# Altium PCB TundraHaptics.PcbDoc
Units mil, origin at the board's own origin, x right, y up, seen from the top; angles counter-clockwise.
Board outline 1690.47 x 1037.77 mil, 2 copper layers (Top Layer, Bottom Layer); 9 components, 5 nets, 42 pads, 0 vias.
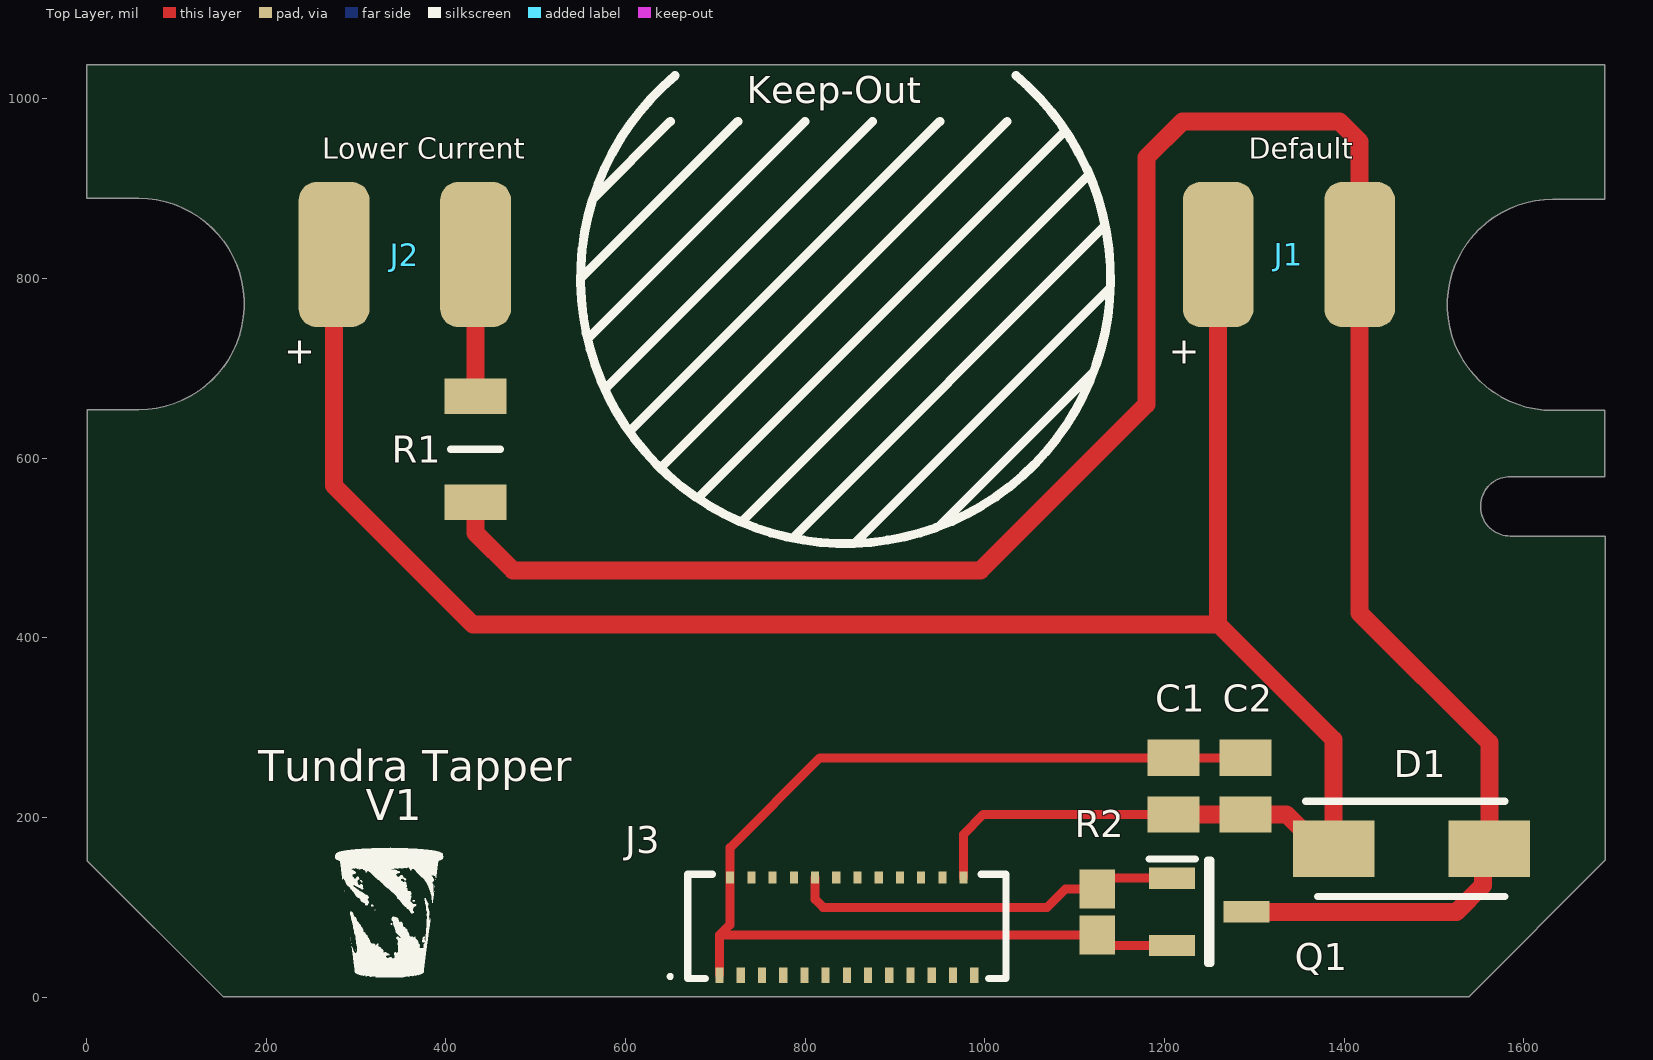
[diagram p0: Top Layer view]
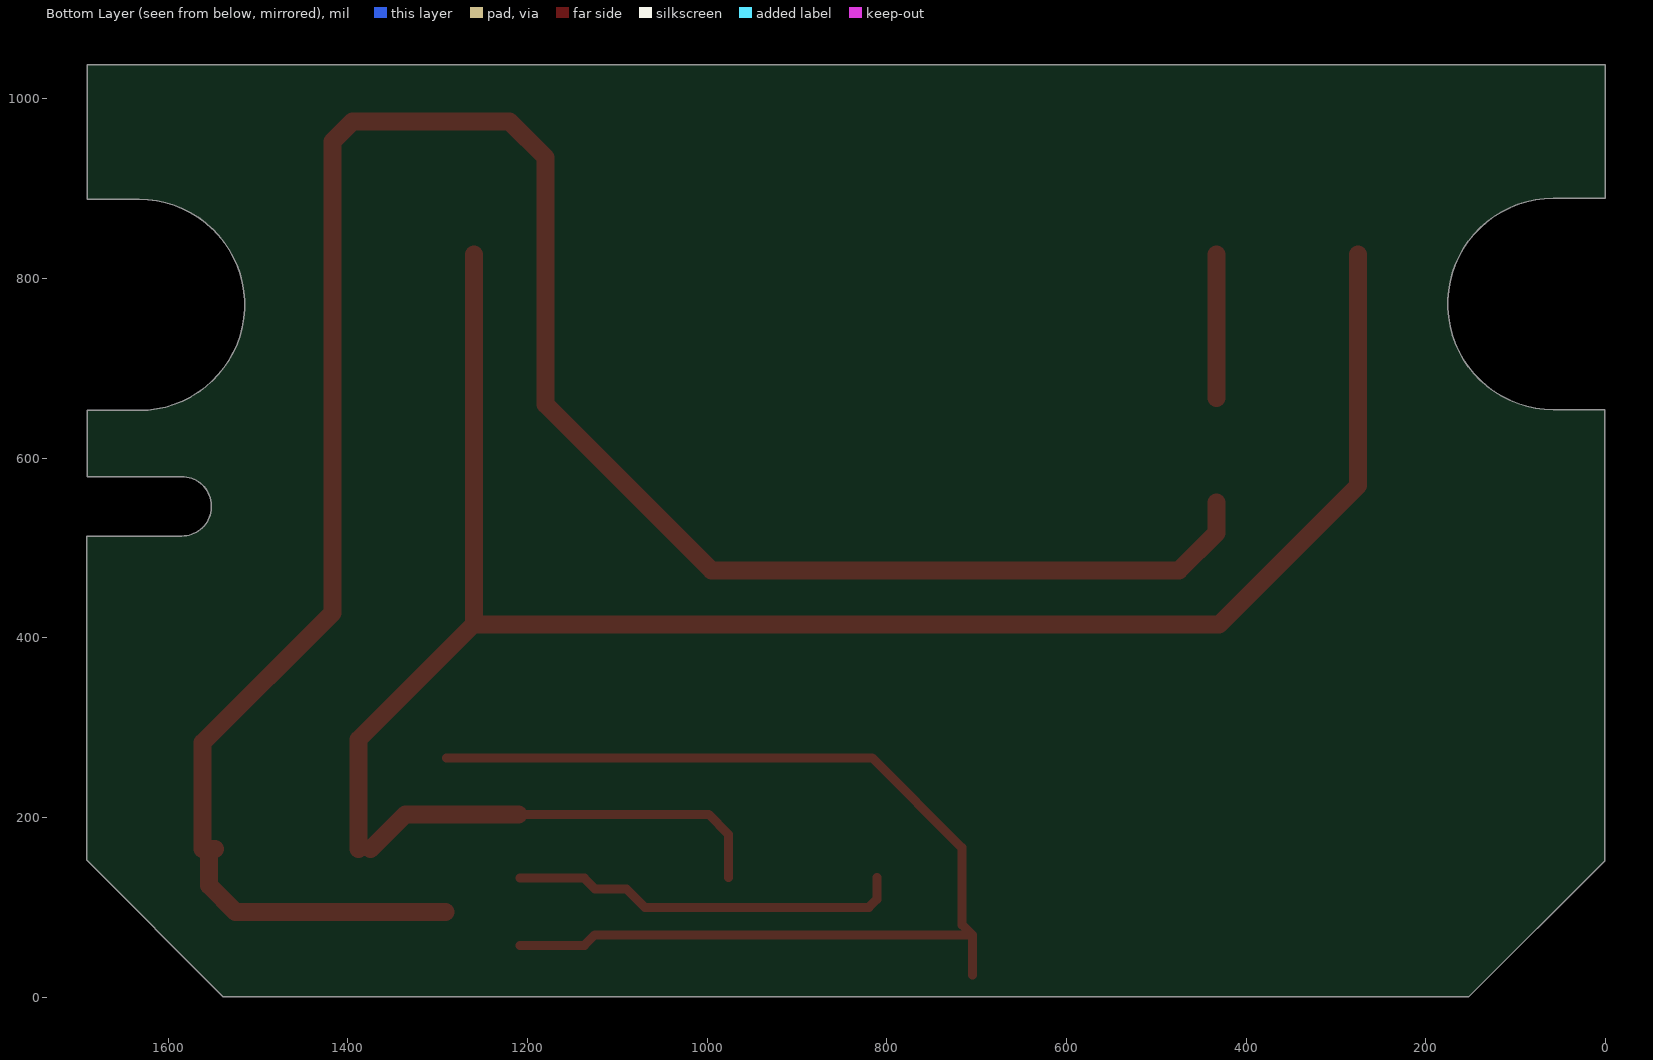
[diagram p1: Bottom Layer view, seen from below]
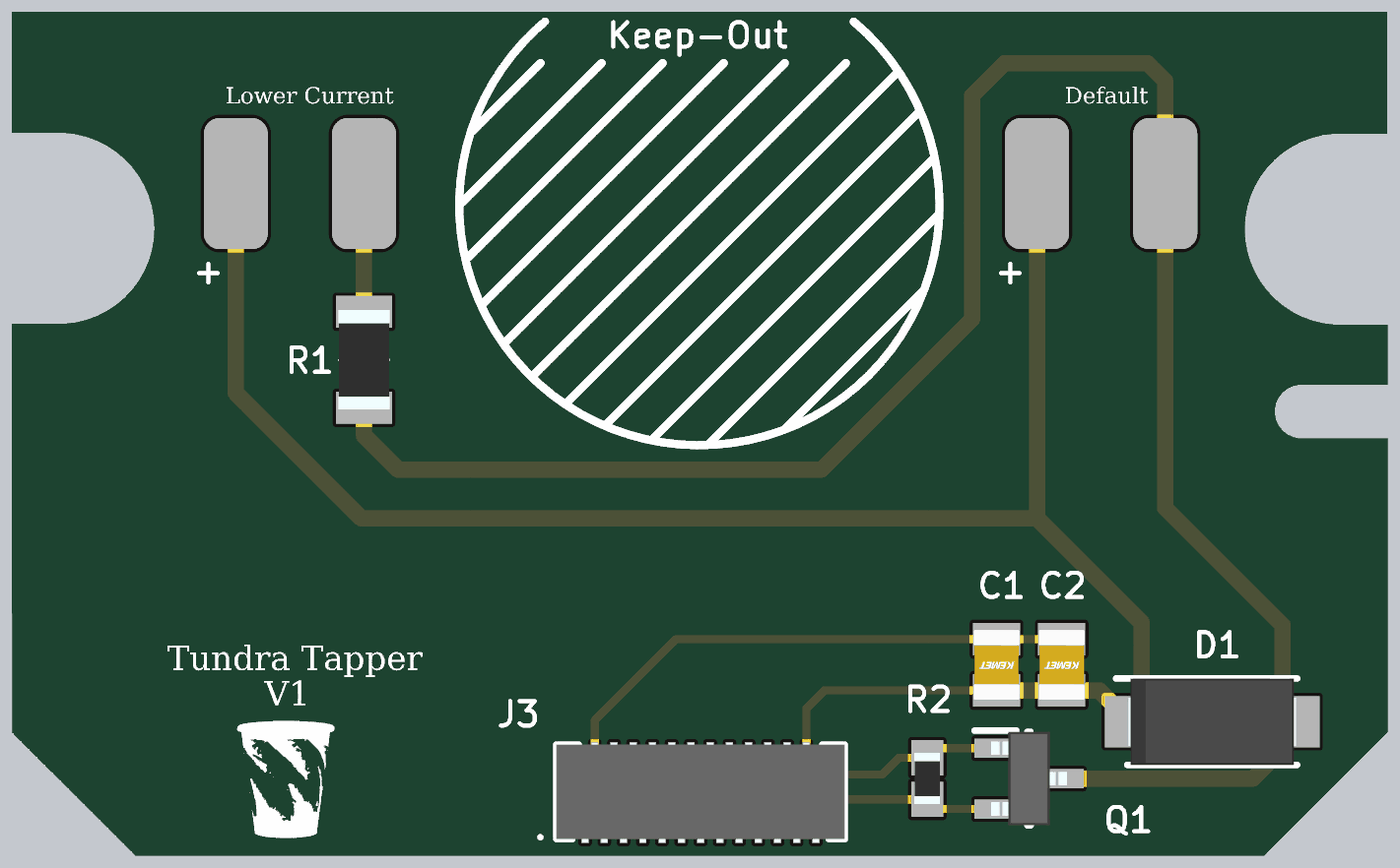
[diagram p2: 3D render of the assembled board from above, using the file's embedded part models]

## Layer stack, top to bottom
Top Solder: solder mask 0.4, Solder Resist, Dk 3.5
Top Layer: signal copper 12.6
Dielectric 1: dielectric 12.6, FR-4, Dk 4.8
Bottom Layer: signal copper 12.6
Bottom Solder: solder mask 0.4, Solder Resist, Dk 3.5

## Board outline
0.79,151.62 152.6,0.25 1538.69,0.25 1690.72,152.73 1690.72,513.3 1584.88,513.3 cw(c1584.88,546.37) 1584.88,579.44 1690.28,579.44 1690.28,653.14 1632.44,653.14 cw(c1632.44,770.7) 1632.44,888.25 1690.19,888.25 1690.19,1038.02 0.25,1038.02 0.25,889.28 58.08,889.28 cw(c58.08,771.72) 58.08,654.17 0.58,654.17

## Design rules (kind name [scope] priority, off if disabled: settings)
Clearance [All] p1: gap=5 ignorepadtopadclearanceinfootprint=FALSE
HoleSize [All] p1: absolutevalues=TRUE maxlimit=250 minlimit=8 maxpercent=80.000 minpercent=20.000
MinimumSolderMaskSliver [All] p1: minsoldermaskwidth=5
PolygonConnect [All] p1: connectstyle=Relief reliefconductorwidth=10 reliefentries=4 polygonreliefangle="90 Angle" airgapwidth=10
RoutingVias [All] p1: holewidth=14 width=28 viastyle="Through Hole" minholewidth=8 minwidth=16 maxholewidth=28 maxwidth=50
SilkToSolderMaskClearance [IsPad] p1: minsilkscreentomaskgap=5 clearancetoexposedcopper=TRUE
SolderMaskExpansion [All] p1: expansion=4 istentingtop=FALSE
Width [All] p1: maxlimit=50 minlimit=5 preferedwidth=10
27 further rules are at their usual default settings.

## Components (designator, comment, footprint, x,y, rotation, side; value= is the part's Value field where it differs from the comment)
C1 "1uF" CAPC2012X140N 1210,235 r90 top
C2 "1uF" CAPC2012X140N 1290,235 r90 top
D1 "M4" DIOM5327X240N 1475,165 r0 top
J1 "Haptic Pads" "HAPTIC PADS" 1259.84,826.77 r0 top
J2 "Haptic Pads" "HAPTIC PADS" 275.59,826.77 r0 top
J3 "AYF332535" AYF332535 846.46,78.74 r0 top
Q1 "N Channel Mosfet" SOT95P237X112-3N 1250,95 r0 top
R1 "51R" RESC3116X65N 433.07,610 r90 top
R2 "10k" RESC1608X55N 1125,95 r270 top

## Footprints (in the part's own frame and the unit in brackets; to place one, negate y for a bottom-side part, rotate by r counter-clockwise, add the part's x,y. Pads: shape width x height; smd on the part's side, far side on the other; paste and mask are expansions set on the pad)
AYF332535 [mm]
  rect 0.23x0.44 smd: 1(-3.6,-1.38) 3(-3,-1.38) 5(-2.4,-1.38) 7(-1.8,-1.38) 9(-1.2,-1.38) 11(-0.6,-1.38) 13(0,-1.38) 15(0.6,-1.38) 17(1.2,-1.38) 19(1.8,-1.38) 21(2.4,-1.38) 23(3,-1.38) 25(3.6,-1.38)
  rect 0.23x0.34 smd: 2(-3.3,1.38) 4(-2.7,1.38) 6(-2.1,1.38) 8(-1.5,1.38) 10(-0.9,1.38) 12(-0.3,1.38) 14(0.3,1.38) 16(0.9,1.38) 18(1.5,1.38) 20(2.1,1.38) 22(2.7,1.38) 24(3.3,1.38)
  silkscreen extent -5.05,-1.48 4.5,1.48, body extent -4.5,-1.58 4.5,1.53, height 1.1
CAPC2012X140N [mm]
  rect 1.02x1.47 smd: 1(-0.8,0) 2(0.8,0)
  body extent -1.1,-0.73 1.1,0.72, height 1.4
DIOM5327X240N [mm]
  rect 2.3x1.6 smd: 1(-2.2,0) 2(2.2,0)
  silkscreen extent -3,-1.35 2.65,1.35, body extent -2.65,-1.35 2.65,1.35, height 2.4
"HAPTIC PADS" [mm]
  rrect50% 2x4.1 smd: 1(0,0) 2(4,0)
RESC1608X55N [mm]
  rect 1.1x1 smd: 1(-0.65,0) 2(0.65,0)
  body extent -0.8,-0.4 0.8,0.4, height 0.55
RESC3116X65N [mm]
  rect 1x1.75 smd: 1(-1.5,0) 2(1.5,0)
  silkscreen extent 0,-0.7 0,0.7, body extent -1.55,-0.8 1.55,0.8, height 0.65
SOT95P237X112-3N [mm]
  rect 1.3x0.6 smd: 1(-1.05,0.95) 2(-1.05,-0.95) 3(1.05,0)
  silkscreen extent -1.7,-1.46 0.05,1.5, body extent -1.18,-1.46 1.18,1.46, height 1.12

## Part data
C1 C2: library part C0805C106K8PACTU-2.5, "Capacitor", Manufacturer_Name=KEMET, Mouser Part Number=N/A, Datasheet Link=https://www.kemet.com/specsheet/C0805C106K8PACTU, Height=1.4mm, Manufacturer_Part_Number=C0805C106K8PACTU-2.5, Mouser Price/Stock=https://www.mouser.com/Search/Refine.aspx?Keyword=N%2FA
D1: "Diode", Manufacturer_Name=Diotec, Mouser Part Number=637-M4, Datasheet Link=https://diotec.com/request/datasheet/m1.pdf, Height=2.4mm, Manufacturer_Part_Number=M4, Mouser Price/Stock=https://www.mouser.co.uk/ProductDetail/Diotec-Semiconductor/M4?qs=OlC7AqGiEDkbHMrD%252B6G9HQ%3D%3D
J3: "Connector", Manufacturer_Name=Panasonic, Mouser Part Number=769-AYF332535, Arrow Part Number=AYF332535, Arrow Price/Stock=https://www.arrow.com/en/products/ayf332535/panasonic?region=nac, Datasheet Link=https://www3.panasonic.biz/ac/cdn/e/control/connector/fpc-ffc/catalog/con_eng_y3b.pdf, Height=1mm, Manufacturer_Part_Number=AYF332535, Mouser Price/Stock=https://www.mouser.co.uk/ProductDetail/Panasonic-Industrial-Devices/AYF332535?qs=RtJ0qN3Pzof%252BwnUyi8U%252B%2FA%3D%3D
Q1: library part SI2302CDS-T1-E3, "Mosfet", Supplier Part Number 1=781-SI2302CDS-E3, Supplier 1=Mouser
R1: library part RC1206FR-0751RL, "51R Resistor", Manufacturer_Name=KEMET, Mouser Part Number=603-RC1206FR-0751RL, Datasheet Link=https://www.sos.sk/productdata/35/10/4/35104/RC1206.pdf, Height=0.65mm, Manufacturer_Part_Number=RC1206FR-0751RL, Mouser Price/Stock=https://www.mouser.com/Search/Refine.aspx?Keyword=603-RC1206FR-0751RL
R2: library part RC0603FR-0710KL, "Resistor", Manufacturer_Name=KEMET, Mouser Part Number=603-RC0603FR-0710KL, Arrow Part Number=RC0603FR-0710KL, Arrow Price/Stock=https://www.arrow.com/en/products/rc0603fr-0710kl/yageo?region=nac, Datasheet Link=http://www.yageo.com/documents/recent/PYu-RC0603_51_RoHS_L_v5.pdf, Height=0.55mm, Manufacturer_Part_Number=RC0603FR-0710KL, Mouser Price/Stock=https://www.mouser.co.uk/ProductDetail/YAGEO/RC0603FR-0710KL?qs=grNVn54RoB%252B3GtjbJj3wJQ%3D%3D

## Nets (pads, with @x,y where several pads share a name; then routed paths per layer and width w, separated by ;. In a path a pad name is that pad's centre, name@x,y a point inside that pad or via, vN(x,y) a via of type N, cw(c..) or ccw(c..) an arc to the next point about the centre after c; other vN are vias at no path point)
GND: C1.2 C2.2 J3.1 J3.2 Q1.2 R2.2 | length 1269.4
  Top Layer w10: J3.1 704.72,69.41 716.15,80.84 ; 707.31,71.99 709.89,69.41 R2.2 1136.81,57.6 Q1.2 ; 716.54,80.46 J3.2 716.54,166.54 816.5,266.5 C1.2 C2.2
NetD1_2: D1.2 J1.2 Q1.3 R1.1 | length 2582.9
  Top Layer w20: R1.1 433.07,516.93 475,475 995,475 1180,660 1180,935 1220,975 1395,975 1417.32,952.68 J1.2 1417.32,427.68 1561.61,283.39 D1.2 D1.2@1547.83,165 ; Q1.3 1525,95 1554.36,124.36 D1.2@1554.36,157.75
NetJ2_2: J2.2 R1.2 | length 159.8
  Top Layer w20: R1.2@433.07,666.93 J2.2
NetJ3_10: J3.10 Q1.1 R2.1 | length 438.9
  Top Layer w10: J3.10 811.02,108.98 820,100 1069.41,100 1090,120.59 R2.1 1136.81,132.4 Q1.1
VSYS: C1.1 C2.1 D1.1 J1.1 J2.1 J3.24 | length 2506.1
  Top Layer w10: J3.24 976.38,181.38 998.5,203.5 C1.1 ; D1.1@1374.61,165 D1.1
  Top Layer w20: J2.1 275.59,569.41 430,415 1259.68,415 1259.84,415.16 ; C1.1 C2.1 1336.1,203.5 D1.1@1374.61,165 ; J1.1 1259.84,415.16 ; D1.1 1388.39,286.61 1259.84,415.16
pads on no net: J3.3 J3.4 J3.5 J3.6 J3.7 J3.8 J3.9 J3.11 J3.12 J3.13 J3.14 J3.15 J3.16 J3.17 J3.18 J3.19 J3.20 J3.21 J3.22 J3.23 J3.25

## Silkscreen, mask and mechanical layers (free items; w line width, h text height)
Top Overlay:
  drawing of 60 lines, arcs and shapes, not listed
  text "Keep-Out" at 735.04,995 h30
  text "Lower Current" at 262.67,925.3 h39.37
  text "Default" at 1293.75,925.3 h39.37
  text "+" at 220,705 h30
  text "+" at 1205,705 h30
  text "Tundra Tapper" at 190.95,228.61 h59.06
  text "V1" at 310.73,185.12 h59.06
Mechanical 1:
  the board outline again, w10